# Altium PCB Serial Power Supply.PcbDoc (part 2 of 2)
Units mm, origin at the board's own origin, x right, y up, seen from the top; angles counter-clockwise.
Board outline 122 x 87 mm, 4 copper layers (Top Layer, Signal Layer 1, Signal Layer 2, Bottom Layer), stack 0.844 mm thick; 119 components, 73 nets, 366 pads, 97 vias.
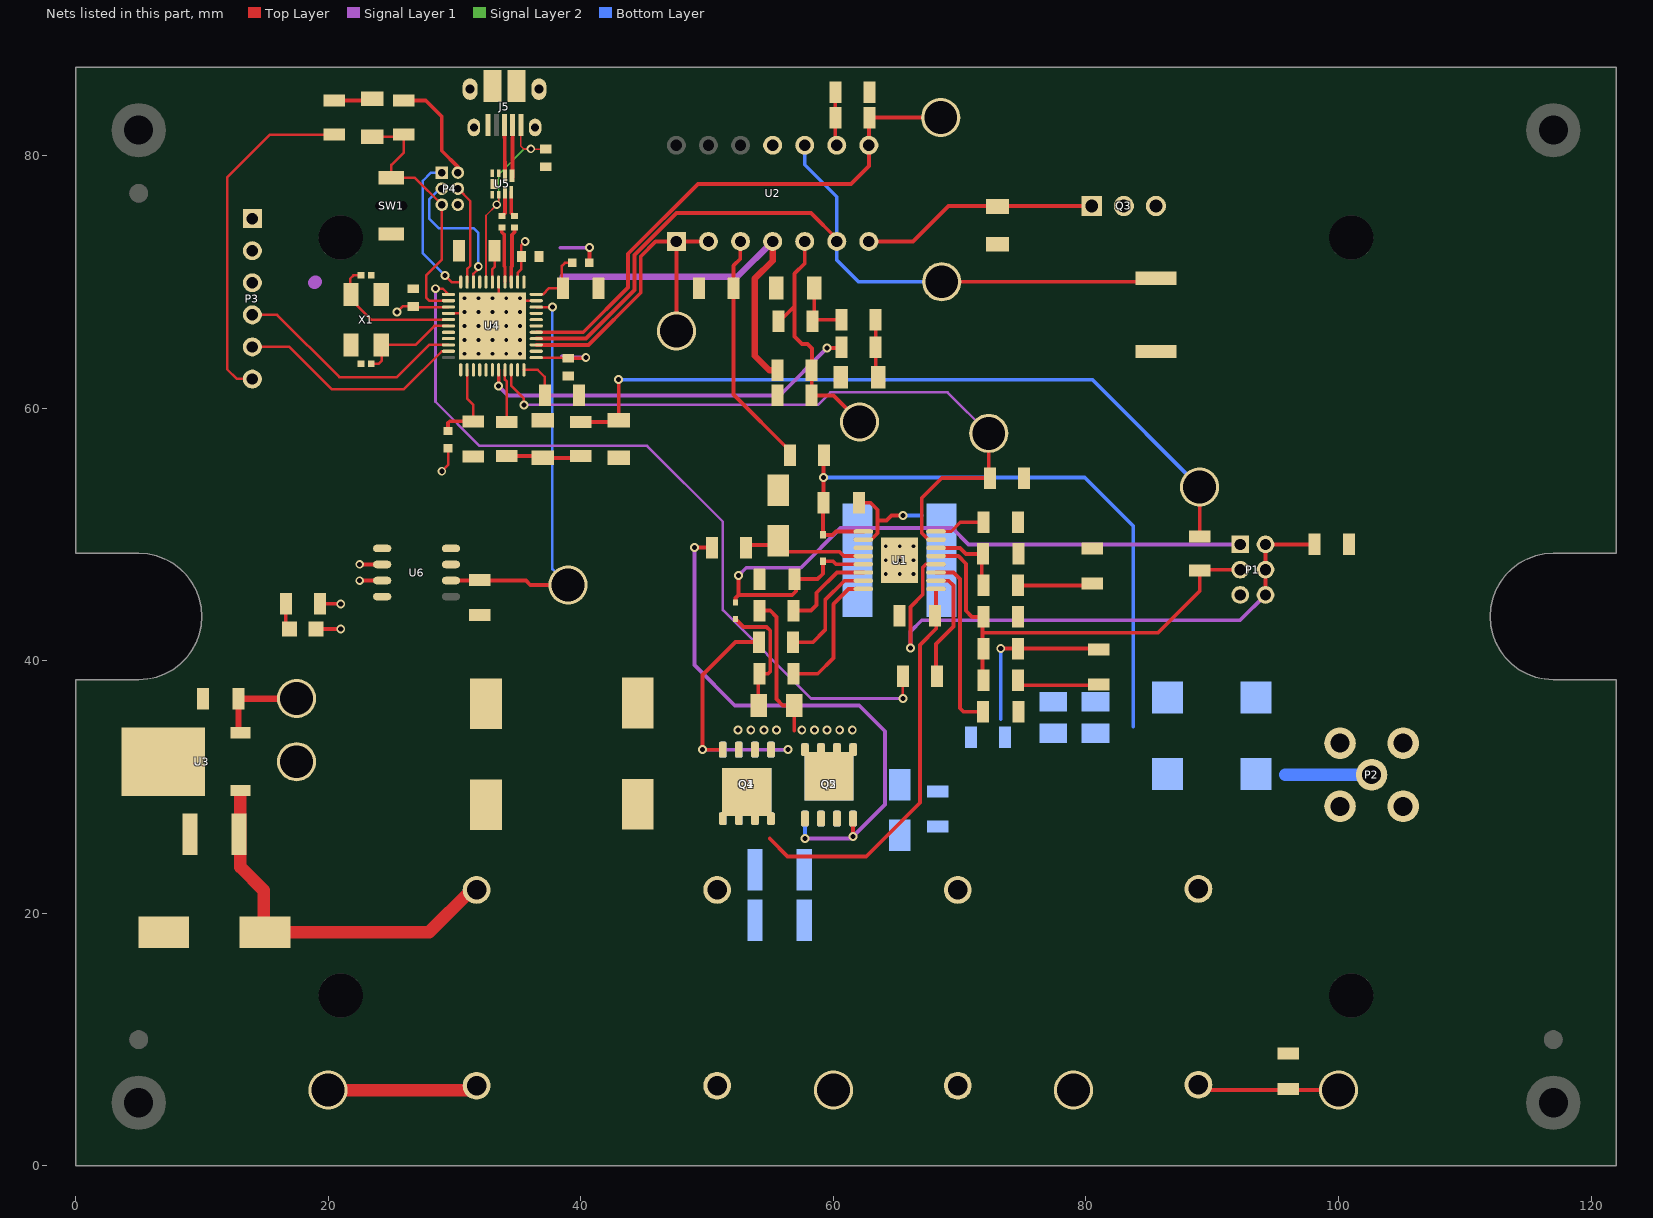
[diagram p4: the nets of this part, all layers, seen from the top]

## Part data (continued)
C16 C17: library part CMP-2100-03689-1, "Standard Tantalum, 22 uF, +/- 10%, 16 V, -55 to 125 degC, 2-Pin SMD (1210), RoHS, Tape and Reel", Capacitance=22uF, Case/Package=1210, Case Code (Metric)=3528, Dielectric Material=Tantalum, ESR (Equivalent Series Resistance)=2.3Ohm, Leakage Current=3.5uA, Manufacturer=AVX, Max Operating Temperature=125degC, Min Operating Temperature=-55degC, Package Description="2-Pin Surface Mount Device, Body 3.5 x 2.85 mm", Package Quantity=1, Package Reference=TAJ-B-2, Tolerance=10%, Voltage=16V, Case Code (Imperial)=1210, Datasheet URL=http://datasheets.avx.com/TAJ.pdf, Datasheet Version=42401.0, Depth=2.8mm, Dissipation Factor=6%, Height=1.9mm, Height - Seated (Max)=0.083inch, Lead Free=LeadFree, Length=3.5mm, Manufacturer URL=http://www.avx.com/, Number of Pins=2, Packaging=TapeandReel, Polarity=Polar, Radiation Hardening=No, REACH SVHC=NoSVHC, RoHSCompliant=True, Termination=SMD/SMT, Voltage Rating=16V, Voltage Rating (DC)=16V, Width=2.8mm
C21 C23 C24 C25 C33 C34 C36: library part CMP-1037-04202-1, "CAP 100nF 50V ±10% 1206 (3216 Metric) Thickness 1mm SMD", Case-EIA=1206, Case-Metric=3216, Rated Voltage="50 V", Tolerance=±10%, Max Thickness="1 mm", Technology=SMT
C22 C26 C35 C37: library part CMP-1035-02796-1, "CAP 10uF 6.3V ±10% 0603 (1608 Metric) Thickness 1mm SMD", Case-EIA=0603, Case-Metric=1608, Rated Voltage="6.3 V", Tolerance=±10%, Max Thickness="1 mm", Technology=SMT
C30 C31: library part CMP-1034-00701-1, "CAP 10pF 10V ±2% 0402 (1005 Metric) Thickness 0.6mm SMD", Case-EIA=0402, Case-Metric=1005, Rated Voltage="10 V", Tolerance=±2%, Max Thickness="0.6 mm", Technology=SMT
D1: library part CMP-1054-00073-1, "Switching Diode, 2-Pin SOD-523, Tape and Reel", Manufacturer="On Semiconductor", PartNumber=BAS521, Supplier Part Number 1=621-BAS521-7, ComponentLink1Description="Manufacturer URL", ComponentLink1URL=http://www.onsemi.com/, ComponentLink2Description=Datasheet, ComponentLink2URL=http://www.onsemi.com/pub_link/Collateral/BAS16XV2T1-D.PDF, ComponentLink3Description="Package Specification", ComponentLink3URL=http://www.onsemi.com/pub_link/Collateral/502-01.PDF, Configuration=Single, DatasheetVersion="Rev. 7", IF Max (A)=0.2, Mounting Technology="Surface Mount", PackageDescription="2-Pin SOD, Body 1.2 x 0.8 mm", PackageReference=SOD-523-2-502-01, PackageVersion="Rev. E, 09/2010", Packing="Tape and Reel", RoHS=FALSE, Supplier 1=Mouser, trr Max (ns)=6
D2 D8: library part CMP-1667-00003-1, "Surface Mount Schottky Barrier Rectifier, 40 V, 3 A, -55 to 150 degC, 2-Pin SMA, RoHS, Tape and Reel", Case\Package=SMA, Forward Current="3 A", Forward Voltage="500 mV", Max Operating Temperature="125 degC", Max Surge Current="80 A", Min Operating Temperature="-55 degC", Package Quantity=5000, Peak Reverse Current="500 uA", Supplier Part Number 1=621-B160-F, ComponentLink1Description="Manufacturer URL", ComponentLink1URL=http://www.diodes.com/, ComponentLink2Description=Datasheet, ComponentLink2URL=http://www.diodes.com/_files/datasheets/ds30891.pdf, DatasheetVersion="Rev. 17 - 2, 09/2015", Elements=1, Height="2.1 mm", Length="4.6 mm", Mount="Surface Mount", Mounting Technology="Surface Mount", PackageDescription="2-Pin Surface Mounted Assembly, Body 4.3 x 2.605 mm, Height 2.4 mm", PackageReference=SMA-2, Packaging="Tape and Reel", Pins=2, Radiation Hardening=No, REACH SVHC="No SVHC", RoHSCompliant=true, Supplier 1=Mouser, Width="2.92 mm"
D3: library part CMP-1667-00004-1, "Fast Switching Diode, 75 V, 0.3 A, -65 to 150 degC, 2-Pin SOD323, RoHS, Tape and Reel", ComponentLink1Description="Manufacturer URL", ComponentLink1URL=http://www.diodes.com/, ComponentLink2Description=Datasheet, ComponentLink2URL=http://www.diodes.com/datasheets/ds30097.pdf, DatasheetVersion="Rev. 25-2, 03/2016", PackageDescription="2-Pin Small Outline Diode, Body 1.7 x 1.3 mm", PackageReference=SOD323-2
DS1: library part CMP-1674-00002-5, "LED Uni-Color Green, 100 mW, 120 mA, -55 to 85 degC, 2-Pin SMD, RoHS, Tape and Reel", Colour=Green, Manufacturer=Lite-On, Max Operating Temperature="85 degC", Min Operating Temperature="-55 degC", Package Quantity=1, ComponentLink1Description="Manufacturer URL", ComponentLink1URL=http://www.us.liteon.com/, ComponentLink2Description=Datasheet, ComponentLink2URL=http://media.digikey.com/pdf/Data%20Sheets/Lite-On%20PDFs/LTST-C170GKT.pdf, DatasheetVersion=03/2003, Height="1.1 mm", Length="2 mm", Mount="Surface Mount", Mounting Technology="Surface Mount", PackageDescription="2-Pin Surface Mount Device, Body 2 x 1.25 mm", PackageReference=C170GKT, Packaging="Tape and Reel", Pins=2, RoHSCompliant=true
FB1 FB2: library part CMP-0686-00368-2, "Chip Ferrite Bead for GHz Band High-speed Signal Lines, 1500 Ohm, 500 mA, -55 to 125 degC, 1.6 x 0.8 x 0.95 mm SMD, Tape and Reel", DC Resistance="0.50 Ohm Max.", Manufacturer=Murata, Operating Temperature Range="-55 to 125 degC", Rated Current="500 mA", ComponentLink1Description="Manufacturer URL", ComponentLink1URL=http://www.murata.com/, ComponentLink2Description=Datasheet, ComponentLink2URL=http://www.murata.com/products/catalog/pdf/c31e.pdf, ComponentLink3Description="Package Specification", ComponentLink3URL=http://www.murata.com/products/catalog/pdf/c31e.pdf, DatasheetVersion=08/2013, Impedance (at 100 MHz)="1500 Ohm +/- 25%", Mounting Technology="Surface Mount", PackageDescription="2-Pin Chip, Body 1.6 x 0.8 mm", PackageReference=BLM18_H950-2, Packing="Tape and Reel", PartNumber=BLM18HE152SN1D
FD1 FD2 FD3: library part Fiducial
J1 J4: library part SYM-20399854-1, "Banana Socket, 20a, 4mm, Pcb, Red", Supplier Part Number 1=80P3616, Supplier 1=Newark
J2 J3: library part SYM-20399854-1, "Banana Socket, 20a, 4mm, Pcb, Black", Supplier Part Number 1=80P3613, Supplier 1=Newark
J5: library part CMP-1698-00007-1, "Micro USB 2.0 B Receptacle, -55 to 85 degC, 5-Pin SMD, RoHS, Tape and Reel", Case\Package=0603, Case Code (Metric)=1608, Max Operating Temperature="155 degC", Min Operating Temperature="-55 degC", Package Quantity=5000, Power Rating="100 mW", Resistance="4.7 kohm", Tolerance=1%, Type (Resistor)="Thick Film", Voltage Rating="75 V", Case Code (Imperial)=0603, ComponentLink1Description="Manufacturer URL", ComponentLink1URL=http://portal.fciconnect.com/, ComponentLink2Description=Datasheet, ComponentLink2URL=http://portal.fciconnect.com/Comergent//fci/drawing/10103594.pdf, DatasheetVersion="Rev. A, 06/2010", Height="0.45 mm", Length="1.55 mm", Mount="Surface Mount", PackageDescription="5-Pin Surface Mount Device, Body 8.04 x 5.62 mm", PackageReference=FCI-10103594-0001LF, Packaging="Tape and Reel", Pins=2, REACH SVHC=Unknown, RoHSCompliant=true, Weight="7.1E-05 oz", Width="0.85 mm"
L1: library part IND-2, Supplier Part Number 1=994-XAL1010-682MEB, Supplier 1=Mouser
MH1 MH2 MH3 MH4: "Mounting Hole, Screw"
P1: library part CMP-1029-00207-1, "Flexible Through-Hole Header, Vertical, -55 to 105 degC, 2 mm Pitch, 6-Pin, Male, RoHS", Manufacturer=Samtec, Temperature Range="-55 to 105 degC", ComponentLink1Description="Manufacturer URL", ComponentLink1URL=http://www.samtec.com, ComponentLink2Description=Datasheet, ComponentLink2URL=http://d2a072wq521u33.cloudfront.net/catalog_english//TMMH_TH.PDF, ComponentLink3Description="Package Specification", ComponentLink3URL=http://www.samtec.com/documents/webfiles/cpdf/TMMH-1XX-XX-XX-D-XXX-XXX-MKT1.pdf, DatasheetVersion=F-214, Mounting Technology=Through-hole, Orientation=Vertical, PackageDescription="2mm x 2mm Terminal Strip Assembly", PackageReference=TMMH-103-06-X-D, PackageVersion="AR, 12/1996", PartNumber=TMMH-103-06-T-D, Pitch="2 mm", RoHS=True
P2: "SMB Straight Connector", LatestRevisionDate=17-Jul-2002, LatestRevisionNote="Re-released for DXP Platform.", Publisher="Altium Limited"
P3: "Header, 6-Pin", LatestRevisionDate=17-Jul-2002, LatestRevisionNote="Re-released for DXP Platform.", Publisher="Altium Limited"
P4: "Header, 3-Pin, Dual row", LatestRevisionDate=17-Jul-2002, LatestRevisionNote="Re-released for DXP Platform.", Publisher="Altium Limited"
Q1 Q2 Q4 Q5: "N-Channel 60 V (D-S) MOSFET", Supplier Part Number 1=781-SI7370DP-GE3, ComponentLink1Description=Datasheet, ComponentLink1URL=https://www.vishay.com/docs/71874/si7370dp.pdf, Supplier 1=Mouser
Q3: library part NMOS-2, "N-Channel Power MOSFET", Supplier Part Number 1=512-MTP3055VL, ComponentLink1Description="Manufacturer Link", ComponentLink1URL=http://www.irf.com/, DatasheetVersion=PD-9.814, LatestRevisionDate=17-Jul-2002, LatestRevisionNote="Re-released for DXP Platform.", Note="Pin 2 is electrically connected to pin 4.", PackageDescription="TO, Thru-Hole, Vertical, Heatsink Mounted; 3 In-Line Leads; Pitch 2.54 mm", PackageReference=TO-220AB, PackageVersion=Feb-1997, Published=8-Jun-2000, Publisher="Altium Limited", Supplier 1=Mouser
R1 R8 R12 R13 R17 R23 R26 R29: library part CMP-1014-00623-1, "10K 0.25W 1% 1206 (3216 Metric)  SMD", Case-EIA=1206, Case-Metric=3216, Power="0.25 W", Tolerance="1 %", Technology=SMT
  R26: Populate=0
R2 R4 R5 R14 R15 R16 R24: library part CMP-1014-00001-1, "Jumper 1206 (3216 Metric)", Case-EIA=1206, Case-Metric=3216, Power=None, Technology=SMT, Tolerance=None
  R16 R24: Populate=0
R3 R9 R18: library part CMP-1014-00736-1, "100K 0.25W 1% 1206 (3216 Metric)  SMD", Case-EIA=1206, Case-Metric=3216, Power="0.25 W", Tolerance="1 %", Technology=SMT
R6: library part CMP-1014-00929-1, "5M1 0.25W 1% 1206 (3216 Metric)  SMD", Case-EIA=1206, Case-Metric=3216, Power="0.25 W", Tolerance="1 %", Technology=SMT
R7: library part CMP-1014-00677-1, "30K9 0.25W 1% 1206 (3216 Metric)  SMD", Case-EIA=1206, Case-Metric=3216, Power="0.25 W", Tolerance="1 %", Technology=SMT
R10: library part CMP-1014-00743-1, "118K 0.25W 1% 1206 (3216 Metric)  SMD", Case-EIA=1206, Case-Metric=3216, Power="0.25 W", Tolerance="1 %", Technology=SMT
R11: library part CMP-1591-00005-1, "1206 (3216 Metric) Chip Resistor", Case-EIA=1206, Case-Metric=3216, Supplier Part Number 1=71-WSLP12066L000FEA, PackageReference=RESC1206(3216), Supplier 1=Mouser
R19 R20 R31 R32: library part CMP-1014-00590-1, "5K1 0.25W 1% 1206 (3216 Metric)  SMD", Case-EIA=1206, Case-Metric=3216, Power="0.25 W", Tolerance="1 %", Technology=SMT
R21 R22: library part CMP-1011-00320-1, "22R 0.063W 1% 0402 (1005 Metric)  SMD", Case-EIA=0402, Case-Metric=1005, Power="0.063 W", Tolerance="1 %", Technology=SMT
R25: library part CMP-1014-00788-1, "300K 0.25W 1% 1206 (3216 Metric)  SMD", Case-EIA=1206, Case-Metric=3216, Power="0.25 W", Tolerance="1 %", Technology=SMT
R27: library part CMP-1018-00510-1, Case-EIA=2512, Case-Metric=6432, Power="1 W", Supplier Part Number 1=71-CSM25120R0100BST, Tolerance="1 %", Supplier 1=Mouser, Technology=SMT
R28: library part CMP-1014-00731-1, "90K9 0.25W 1% 1206 (3216 Metric)  SMD", Case-EIA=1206, Case-Metric=3216, Power="0.25 W", Tolerance="1 %", Technology=SMT
R30: library part CMP-1014-00754-1, "150K 0.25W 1% 1206 (3216 Metric)  SMD", Case-EIA=1206, Case-Metric=3216, Power="0.25 W", Tolerance="1 %", Technology=SMT
SW1: library part CMP-0587-00001-2, "Switch, SPST Push Button, 50 mA, 12 V DC, SMD, -30 to 85 degC, RoHS", Contact Resistance="100 mW max", Dielectric Strength="250 V AC for 1 min", Insulation Resistance="100 MW min. 100 V DC", Manufacturer=Jianfu, Operating Temperature="-30 to 85 degC", PartNumber=TVAF06, Rating="50 mA. 12 V DC", ComponentLink1Description="Manufacturer URL", ComponentLink1URL=http://www.jian-fu.com/, ComponentLink2Description=Datasheet, ComponentLink2URL=http://en.jian-fu.com/product-22.html, Lifetime="100000 Cycles min", Mounting Technology="Surface Mount", PackageDescription="2-Pin Switch, Push Button, SMD, Body 2.9 x 3.9 mm", PackageReference=TVAF06, RoHS=TRUE, Travel="0.13 +/- 0.05 mm"
TP1 TP2 TP3 TP4 TP5 TP6 TP7 TP8 TP9 TP11 TP13 TP14: library part CMP-1672-00001-4, "Terminal DBL Turret, Through Hole, RoHS", Package Quantity=1, Supplier Part Number 1=575-2501200800000, Contact Finish=Tin, Contact Material=Brass, DatasheetVersion="Rev. A, 02/2008", Lead Pitch="0.218 inch", Length="2.77 mm", Mount="Through Hole", Mounting Technology="Through Hole", PackageDescription="1-Pin Through Hole Device, Dia 3.18 mm", PackageReference=1502-2, Pins=50, REACH SVHC="No SVHC", RoHSCompliant=true, Supplier 1=Mouser
TP10: library part CMP-1672-00001-4, Package Quantity=1, Supplier Part Number 1=575-2501200800000, Contact Finish=Tin, Contact Material=Brass, DatasheetVersion="Rev. A, 02/2008", Lead Pitch="0.218 inch", Length="2.77 mm", Mount="Through Hole", Mounting Technology="Through Hole", PackageDescription="1-Pin Through Hole Device, Dia 3.18 mm", PackageReference=1502-2, Pins=50, REACH SVHC="No SVHC", RoHSCompliant=true, Supplier 1=Mouser
U1: library part CMP-0491-00624-1, "High Voltage Synchronous Current Mode Step-Down Controller with Adjustable Operating Frequency, 16-pin SOP (FE-16-EPV-BC), -55 to 125 degC", Frequency Adjust Range="100kHz - 500kHz", Manufacturer="Linear Technology", ComponentLink1Description="Manufacturer URL", ComponentLink1URL=http://www.linear.com/, ComponentLink2Description=Datasheet, ComponentLink2URL=http://cds.linear.com/docs/en/datasheet/3845fd.pdf, ComponentLink3Description="Package Specification", ComponentLink3URL=http://cds.linear.com/docs/en/packaging/05081663__J_FE16(BC).pdf, DatasheetVersion="Rev. D", Mounting Technology="Surface Mount", Number of Outputs=1, PackageDescription="16-Pin Plastic TSSOP, Body 5 x 4.4 mm, Pitch 0.65 mm", PackageReference=FE-16, PackageVersion="Rev. J, 11/2012", PartNumber=LT3845MPFE, RoHS=FALSE
U2: library part CMP-0055-00082-1, "Low Power Quad Operational Amplifier, 14-pin MDIP", Manufacturer="National Semiconductor", PackageTopMarking=NSUZXYYTTE#*LM324N, PowerWise=N, Code_JEDEC=MS-001-AA, CompType=Amplifiers, DatasheetVersion=Aug-2000, PackageDescription="MDIP, .750 x .250 x.130in, 14 Lead, .100in Pitch", PackageReference=N14A, PackageVersion="revG, May-2006", PinCount=14, RoHS=N
U3: library part CMP-0062-00202-1, "3-Terminal Positive Voltage Regulators, 3-pin TO-252", Manufacturer="National Semiconductor", PackageTopMarking=NSUZXYTT*LM78M05*CDT, PowerWise=N, Code_JEDEC=TO-252-AA, CompType="LDO IC", DatasheetVersion=Aug-2005, PackageDescription="TO252, Molded, Jedec, 6.8 x 6.10 x 2.30mm Body, 3 Lead, 2.28mm Pitch, Surface Mount", PackageReference=TD03B, PackageVersion="revD, Feb-2009", PinCount=3, RoHS=N
U4: library part CMP-0095-00166-2, "8-bit AVR Microcontroller, 2.7-5.5V, 16MHz, 32KB Flash, 1KB EEPROM, 2.5KB SRAM, USB Controller, 44-pin QFN, Industrial Grade (-40°C to 85°C), Ext Osc", Code_JEDEC=MO-220-VKKD-1, ComponentLink1Description="Manufacturer URL", ComponentLink1URL=http://www.atmel.com/, ComponentLink2Description="ATmega16U4/32U4 Datasheet", ComponentLink2URL=http://www.atmel.com/dyn/resources/prod_documents/doc7766.pdf, ComponentLink3Description="ATmega16U4 ATmega32U4 Summary", ComponentLink3URL=http://www.atmel.com/dyn/resources/prod_documents/7766S.pdf, DatasheetVersion="revF, Nov-2010", PackageDescription="44-Pin Quad Flat No-Lead Package, 7 x 7 mm Body, 0.5 mm Pitch (QFN)", PackageReference=44PW, PackageVersion="revG, Sep-2009", RevisionNote="DatasheetVersion, PackageVersion & PCB updated. URLs added."
U5: library part CMP-1066-00065-1, "Single Pair Common Mode Filter with ESD Protection, -40 to 85 degC, 8-Pin WDFN, Pb-Free, Tape and Reel", Manufacturer="On Semiconductor", ComponentLink1Description="Manufacturer URL", ComponentLink1URL=http://www.onsemi.com/, ComponentLink2Description=Datasheet, ComponentLink2URL=http://www.onsemi.com/pub_link/Collateral/EMI2121MT-D.PDF, ComponentLink3Description="Package Specification", ComponentLink3URL=http://www.onsemi.com/pub_link/Collateral/511BN.PDF, C Typ (pF)=0.8, DatasheetVersion="Rev. 2", Mounting Technology="Surface Mount", Number of Lines=3, PackageDescription="8-Pin Small Outline No-Lead, Body 2.2 x 2 mm, Pitch 0.5 mm", PackageReference=WDFN-8-511BN, PackageVersion="Rev. A, 12/2012", Packing="Tape and Reel", PartNumber=EMI2121MTTAG, RoHS=Pb-Free, VRWM Max (V)=5
U6: library part CMP-0074-00330-3, "Precision Micropower Low Dropout Voltage Reference, 8-pin Narrow SOIC", Manufacturer="Texas Instruments", PackageTopMarking=NSZXTT*4140A*CM2.0, PowerWise=Y, Supplier Part Number 1=926-LM4140ACM10NOPB, Code_IPC=SOIC127P600-8, Code_JEDEC=MS-012-AA, ComponentLink1Description=Datasheet, ComponentLink1URL=http://www.ti.com/general/docs/lit/getliterature.tsp?genericPartNumber=LM4140&fileType=pdf, CompType="Voltage Reference IC", DatasheetVersion=Feb-2005, PackageDescription="SOIC Narrow, 4.9 x 3.9 x 1.45mm, 8 Lead, 1.27mm Pitch", PackageReference=D0008A, PackageVersion="revM, May-2009", PinCount=8, RevisionNote="Component URLs added", RoHS=N, Supplier 1=Mouser
X1: library part CMP-1688-00003-1, "Ceramic SMD Crystal, 16 MHz, +/- 20 ppm, 50 Ohm, -20 to 70 degC, 4-Pin SMD, RoHS, Tape and Reel", Case/Package=5028, Current Rating="1.82 A", Max Operating Temperature=105degC, Min Operating Temperature=-40degC, Package Quantity=500, Resistance="0.033 Ohm", Tolerance=30%, ComponentLink1Description="Manufacturer URL", ComponentLink1URL=http://www.abracon.com/, ComponentLink2Description=Datasheet, ComponentLink2URL=http://www.abracon.com/Resonators/abm3b.pdf, DatasheetVersion=Aug-15, Height="2.8 mm", Length="0.197 inch", Mount="Surface Mount", PackageDescription="4-Pin Surface Mount Device, Body 5 x 3.2 mm", PackageReference=ABM3B, Packaging="Tape and Reel", REACH SVHC=Unknown, RoHSCompliant=True, Shielding=Shielded, Width="0.197 inch"

## Free pads (board coordinates)
  round 3.5 hole 3.5: MH(21,13.5) MH(21,73.5) MH(101,13.5) MH(101,73.5)

## Via types
v1: diameter 0.7, hole 0.305, Top Layer to Bottom Layer, 34 vias
v2: diameter 0.7, hole 0.4, Top Layer to Bottom Layer, 30 vias
v3: diameter 0.8, hole 0.5, Top Layer to Bottom Layer, 24 vias
v4: diameter 0.7, hole 0.4, Top Layer to Bottom Layer, tented both sides, 9 vias

## Nets (pads, with @x,y where several pads share a name; then routed paths per layer and width w, separated by ;. In a path a pad name is that pad's centre, name@x,y a point inside that pad or via, vN(x,y) a via of type N, cw(c..) or ccw(c..) an arc to the next point about the centre after c; other vN are vias at no path point)
8: U4.28
9: C34.1 R25.1 R31.1 | length 4.9
  Top Layer w0.3: C34.1@58.481,69.5 58.481,67.161 58.32,67 R31.1@60.65,67
10: C36.1 R1.1 R32.1 TP2.1 | length 59.6
  Top Layer w0.3: R32.1@40,58.9 42.85,58.9 C36.1@43,59.05 v2(43,62.25) ; R1.1@89,49.95 TP2.1@89,53.75
  Bottom Layer w0.3: v2(43,62.25) 80.5,62.25 TP2.1@89,53.75
11: R3.1 U4.12 | length 62.7
  Top Layer w0.2: v2(28.5,69.45) 29.075,69.45 U4.12@29.525,69 ; v2(65.5,37.006) R3.1@65.5,38.75
  Signal Layer 1 w0.2: v2(28.5,69.45) 28.5,60.5 32,57 45.25,57 51.25,51 51.25,44 58.244,37.006 v2(65.5,37.006)
12: U4.26
13: U4.32
+5: C21.1 C22.2 C35.2 C37.2 FB1.1 FB2.1 P3.3 P4.2 R13.1 R23.2 R24.2 TP7.1 U2.4 U3.3 U4.2 U4.14 U4.34 U6.2 U6.3 | length 70
  Top Layer w0.2: v2(25.45,67.6) 25.9,68.05 C35.2@26.75,68.05 26.8,68 U4.14@29.525,68 ; v2(29,55) 29.5,55.5 FB1.1@29.5,56.825 ; U4.2@35,69.975 35,70.7 35.3,71 C37.2@35.3,72 35.3,72.9 v2(35.6,73.2) ; U4.34@36.475,64 38.725,64 C22.2@38.887,63.838
  Top Layer w0.3: U3.3@12.9,34.43 U3.3@13.05,34.28 ; TP7.1@17.469,36.975 TP7.1@17.5,37.006 ; R13.1@19.35,44.5 v2(21,44.5) ; v2(22.5,46.331) 22.515,46.346 U6.3@24.275,46.346 ; v2(22.5,47.631) 22.515,47.616 U6.2@24.275,47.616 ; R23.2@26,84.35 27.727,84.35 29,83.077 29,80.367 30.27,79.097 P4.2@30.27,78.64 ; C22.2@39,63.95 40.35,63.95 v2(40.4,64) ; FB2.1@40.675,71.5 40.7,71.525 v2(40.7,72.7)
  Top Layer w0.5: U3.3@12.9,34.43 C21.1@12.9,36.975 TP7.1@17.469,36.975 ; U2.4@55.191,73.19 55.191,71.666 53.785,70.26 53.785,64.153 54.938,63 R24.2@55.581,63
  Signal Layer 1 w0.3: 38.4,72.7 v2(40.7,72.7) ; 38.525,64.1 38.625,64 v2(40.4,64)
  Signal Layer 1 w0.5: 38.55,70.4 52.401,70.4 U2.4@55.191,73.19
  Signal Layer 1 w1: 18.92,69.92 19,70
+20: C1.2 C8.1 C9.1 C10.2 C11.2 C19.1 C20.2 J1.1 Q1.D Q4.D TP6.1 U1.1 U3.1 | length 73.6
  Top Layer w0.3: 54.96,25.911 56.371,24.5 62.598,24.5 66.85,28.752 66.85,41.25 68.15,42.55 68.15,43.556 68.125,43.581 U1.1@68.125,45.681
  Top Layer w1: U3.1@13.05,29.5 13.05,23.65 14.9,21.8 14.9,18.5 C19.1@15,18.5 28,18.5 31.35,21.85 J1.1@31.75,21.85 ; TP6.1@20,6 31.4,6 J1.1@31.75,6.35
A0: TP4.1 U2.1 U2.2 U4.36 | length 25.8
  Top Layer w0.3: U4.36@36.475,65 40.614,65 44.75,69.136 44.75,72.01 45.93,73.19 U2.1@47.571,73.19 ; TP4.1@47.571,66.093 U2.1@47.571,73.19 ; U2.2@50.111,73.19 U2.1@47.571,73.19
A1: Q3.3 R27.2 TP13.1 U2.6 U2.10 U4.37 | length 67.2
  Top Layer w0.3: U4.37@36.475,65.5 40.407,65.5 44.25,69.343 44.25,72.114 47.586,75.45 58.231,75.45 60.271,73.41 U2.6@60.271,73.19 ; TP13.1@68.575,70 85.26,70 R27.2@85.54,70.28 R27.2@85.69,70.43 ; Q3.3@85.4,75.86 Q3.3@85.54,76
  Bottom Layer w0.3: U2.10@57.731,80.81 57.731,79.269 60.271,76.729 U2.6@60.271,73.19 60.271,71.729 62,70 TP13.1@68.575,70
A2: R28.2 TP14.1 U2.8 U4.38 | length 42.9
  Top Layer w0.3: U4.38@36.475,66 40.2,66 43.75,69.55 43.75,72.218 49.282,77.75 61.4,77.75 62.811,79.161 U2.8@62.811,80.81 62.811,82.961 R28.2@62.85,83 TP14.1@68.5,83
A3: U4.39
A4: U4.40
A5: U4.41
D2: U4.19
D3: U4.18
D4: U4.25
D5: R18.2 TP3.1 U1.7 U4.31 | length 55.4
  Top Layer w0.2: U4.31@34.5,63.025 34.5,61.75 35.5,60.75 v2(35.5,60.25)
  Top Layer w0.3: U1.7@68.125,49.581 67.536,49.581 67,50.117 67,52.881 68.575,54.456 72.3,54.456 TP3.1@72.3,58
  Signal Layer 1 w0.2: v2(35.5,60.25) 58.771,60.25 59.771,61.25 69.05,61.25 TP3.1@72.3,58
D6: U4.27
D7: U4.1
GND: C1.1 C3.1 C4.1 C5.1 C6.1 C7.1 C8.2 C9.2 C10.1 C11.1 C14.2 C15.2 C16.2 C17.2 C18.1 C19.2 C20.1 C21.2 C22.1 C24.2 C25.2 C26.1 C27.1 C28.1 C29.1 C30.1 C31.1 C32.1 C33.2 C34.2 C35.1 C36.2 C37.1 D2.1 D8.1 DS1.1 J2.1 J5.5 J5.6 J5.7 J5.8 J5.9 J5.10 J5.11 P1.5 P3.1 P3.2 P4.6 Q2.S Q5.S R6.1 R8.1 R10.1 R12.2 R17.2 R18.1 R26.1 R27.1 R29.1 SW1.1 TP5.1 TP8.1 U1.11 U1.17 U2.11 U3.4 U4.5 U4.15 U4.23 U4.35 U4.43 U4.45 U5.3 U5.4 U5.5 U5.9 U6.1 U6.4 U6.7 U6.8 X1.2 X1.4 | length 13.1
  Top Layer w0.2: U4.15@29.525,67.5 32,67.5 v1(33,66.5) U4.45@33.5,67 ; U4.5@33.5,69.975 U4.45@33.5,67 ; U4.43@36.475,68.5 35,68.5 v1(34.1,67.6) U4.45@33.5,67
  Top Layer w0.3: DS1.1@19.05,42.5 v2(21,42.5)
  other v1: 64.15,46.856 65.25,46.856 66.35,46.856 64.15,47.956 65.25,47.956 66.35,47.956 64.15,49.056 65.25,49.056 66.35,49.056 30.8,64.3 31.9,64.3 33,64.3 34.1,64.3 35.2,64.3 30.8,65.4 31.9,65.4 33,65.4 34.1,65.4 35.2,65.4 30.8,66.5 31.9,66.5 34.1,66.5 35.2,66.5 30.8,67.6 31.9,67.6 33,67.6 35.2,67.6 30.8,68.7 31.9,68.7 33,68.7 34.1,68.7 35.2,68.7
NetC2_1: C2.1 D1.1 R2.2 | length 9.9
  Top Layer w0.3: D1.1@52.25,43.296 52.878,42.668 54.709,42.668 55,42.378 55,39.146 54.822,38.968 54.05,38.968 54.05,36.504 C2.1@54.097,36.456
NetC2_2: C2.2 C4.2 D2.2 L1.1 Q1.S Q2.D Q4.S Q5.D R5.2 | length 11.8
  Top Layer w0.3: R5.2@54.05,43.968 55,43.968 55.5,43.468 55.5,36.954 55.997,36.456 C2.2@56.897,36.456 56.897,34.456
  other v4: 52.461,34.5 53.461,34.5 54.5,34.5 55.5,34.5 57.5,34.5 58.5,34.5 59.5,34.5 60.5,34.5 61.5,34.5
NetC3_2: C3.2 U1.3 | length 14.2
  Top Layer w0.3: U1.3@68.125,46.981 69.5,46.981 70.025,46.456 70.025,36.231 70.3,35.956 C3.2@71.75,35.956
NetC5_2: C5.2 D1.2 D3.2 P1.1 U1.13 | length 56.3
  Top Layer w0.3: D1.2@52.25,44.616 52.25,44.956 52.5,45.206 ; v2(52.5,46.756) 52.5,45.206 ; U1.13@62.375,47.631 60.206,47.631 59.961,47.876 D3.2@59.172,47.876 59.172,46.879 58.75,46.456 57.039,46.456 57.039,45.495 56.75,45.206 52.5,45.206
  Signal Layer 1 w0.3: v2(52.5,46.756) 53.1,47.356 57.425,47.356 60.569,50.5 69.406,50.5 70.7,49.206 P1.1@92.212,49.206
NetC6_2: C6.2 R7.2 U1.6 | length 6.3
  Top Layer w0.3: U1.6@68.125,48.931 70.025,48.931 70.5,48.456 71.75,48.456 71.75,46.006 R7.2@71.8,45.956
NetC7_2: C7.2 R7.1 | length 5.9
  Top Layer w0.3: R7.1@74.6,45.956 C7.2@80.5,45.956
NetC12_1: C12.1 R14.2 | length 6.6
  Top Layer w0.3: R14.2@74.6,38.456 75,38.056 C12.1@81,38.056
NetC23_1: C23.1 R16.2 | length 3.1
  Top Layer w0.3: R16.2@20.5,84.35 23.35,84.35 C23.1@23.5,84.5
NetC24_1: C24.1 R19.1 R31.2 | length 4.6
  Top Layer w0.3: R31.2@63.35,67 R19.1@63.35,64.8 63.35,62.671 C24.1@63.571,62.45
NetC25_1: C25.1 R20.1 R32.2 | length 6
  Top Layer w0.3: R20.1@34.15,56.2 36.85,56.2 C25.1@37,56.05 39.85,56.05 R32.2@40,56.2
NetC27_2: C27.2 TP9.1 U4.42 U6.6 | length 33.2
  Top Layer w0.2: U4.42@36.475,68 v2(37.75,68)
  Top Layer w0.3: U6.6@29.725,46.346 35.654,46.346 36,46 TP9.1@39,46
  Bottom Layer w0.2: v2(37.75,68) 37.75,47.25 TP9.1@39,46
NetC28_2: C28.2 FB2.2 U4.44 | length 5.1
  Top Layer w0.2: U4.44@36.475,69 37,69 37.5,69.5 C28.2@38.6,69.5 38.5,69.6 38.5,71.25 38.75,71.5 FB2.2@39.325,71.5
NetC29_2: C29.2 FB1.2 U4.24 | length 7
  Top Layer w0.2: U4.24@31,63.025 31,60.75 31.5,60.25 C29.2@31.5,58.95
  Top Layer w0.3: FB1.2@29.5,58.175 29.5,58.825 29.625,58.95 C29.2@31.5,58.95
NetC30_2: C30.2 U4.16 X1.1 | length 11
  Top Layer w0.2: C30.2@22.6,70.5 22,70.5 21.75,70.25 21.75,69.05 X1.1@21.8,69 21.8,68.58 23.38,67 U4.16@29.525,67
NetC31_2: C31.2 U4.17 X1.3 | length 8.2
  Top Layer w0.2: C31.2@23.4,63.5 24,63.5 24.25,63.75 24.25,64.95 X1.3@24.2,65 26.907,65 28.407,66.5 U4.17@29.525,66.5
NetC32_2: C32.2 U4.6 | length 2.6
  Top Layer w0.2: U4.6@33,69.975 33,71 33.172,71.172 C32.2@33.172,72.46
NetC33_1: C33.1 Q3.1 U2.7 | length 18.8
  Top Layer w0.3: U2.7@62.811,73.19 66.315,73.19 69.125,76 Q3.1@80.46,76
NetD8_2: D8.2 R15.1 U1.12 | length 9.5
  Top Layer w0.3: R15.1@53.2,49.156 55.75,49.156 56.275,48.631 60.475,48.631 60.825,48.281 U1.12@62.375,48.281
NetDS1_2: DS1.2 R13.2 | length 2.1
  Top Layer w0.3: R13.2@16.65,44.5 16.65,42.8 DS1.2@16.95,42.5
NetP1_2: P1.2 P1.4 P1.6 R6.2 U1.4 | length 46.4
  Top Layer w0.3: v2(66.1,41) 66.1,44.256 67.073,45.229 67.073,47.373 67.331,47.631 U1.4@68.125,47.631 ; P1.6@94.212,44.956 P1.6@94.212,45.206 P1.4@94.212,47.206 P1.2@94.212,48.956 ; P1.2@94.212,49.206 R6.2@98.012,49.206
  Signal Layer 1 w0.3: v2(66.1,41) 66.1,42.3 67,43.2 92.206,43.2 P1.6@94.212,45.206
NetP3_4: P3.4 U4.20 | length 18.6
  Top Layer w0.2: P3.4@14,67.38 15.96,67.38 20.89,62.45 25.45,62.45 28,65 U4.20@29.525,65
NetP3_5: P3.5 U4.21 | length 18.2
  Top Layer w0.2: P3.5@14,64.84 16.935,64.84 20.275,61.5 26,61.5 29,64.5 U4.21@29.525,64.5
NetP3_6: P3.6 R16.1 | length 27.4
  Top Layer w0.2: P3.6@14,62.3 13.975,62.325 12.75,62.325 12,63.075 12,78.25 15.4,81.65 R16.1@20.5,81.65
NetQ1_G: Q1.G Q4.G R4.2 | length 21.1
  Top Layer w0.3: Q4.G@51.25,32.956 v2(49.65,32.956) 49.65,38.856 52.262,41.468 R4.2@54.01,41.468
  Signal Layer 1 w0.3: v2(49.65,32.956) v2(56.4,32.956)
  Bottom Layer w0.3: Q1.G@55.039,32.978 Q1.G@55.06,32.956 v2(56.4,32.956)
NetQ2_G: Q2.G Q5.G R15.2 | length 44.2
  Top Layer w0.3: v2(49,48.956) R15.2@50.4,48.956 ; v2(61.546,26.086) 61.56,26.1 Q5.G@61.56,27.491
  Signal Layer 1 w0.3: v2(49,48.956) 49,39.651 52.195,36.456 62.044,36.456 64.083,34.417 64.083,28.623 v2(61.546,26.086) 61.371,25.911 v2(57.75,25.911)
  Bottom Layer w0.3: v2(57.75,25.911) Q2.G@57.75,27.491
NetR2_1: R2.1 U1.16 | length 10.7
  Top Layer w0.3: R2.1@56.95,38.968 58.762,38.968 60,40.206 60,44.476 61.205,45.681 U1.16@62.375,45.681
NetR3_2: R3.2 U1.2 | length 9.3
  Top Layer w0.3: R3.2@68.125,38.75 68.125,41.331 69.5,42.706 69.5,45.956 69.125,46.331 U1.2@68.125,46.331
NetR4_1: R4.1 U1.15 | length 8.9
  Top Layer w0.3: R4.1@56.91,41.468 56.922,41.456 58.385,41.456 59.349,42.42 59.349,44.805 60.875,46.331 U1.15@62.375,46.331
NetR5_1: R5.1 U1.14 | length 7.2
  Top Layer w0.3: R5.1@56.95,43.968 58.229,43.968 58.672,44.412 58.672,45.374 60.28,46.981 U1.14@62.375,46.981
NetR10_2: R10.2 U1.8 | length 4
  Top Layer w0.254: U1.8@68.125,50.231 69.325,50.231 70.05,50.956 R10.2@71.8,50.956
NetR12_1: R12.1 R30.1 U2.3 | length 19
  Top Layer w0.3: U2.3@52.625,73.225 52.625,71.8 52.1,71.275 52.1,61.075 56.55,56.625 R30.1@56.55,56.25
NetR17_1: R17.1 U4.33 | length 3.4
  Top Layer w0.2: U4.33@35.5,63.025 36.595,63.025 37.15,62.47 R17.1@37.15,61
NetR19_2: R19.2 U4.29 | length 30.3
  Top Layer w0.3: v2(33.5,61.75) U4.29@33.5,63.025 ; v2(59.5,64.75) 60.6,64.75 R19.2@60.65,64.8
  Signal Layer 1 w0.3: v2(33.5,61.75) 34.25,61 55.75,61 v2(59.5,64.75)
NetR20_2: R20.2 U4.30 | length 4.2
  Top Layer w0.2: U4.30@34,63.025 34,62.25 34.15,62.1 R20.2@34.15,58.9
NetR24_1: R24.1 R25.2 R26.2 TP11.1 U2.5 | length 19.8
  Top Layer w0.3: R25.2@55.665,66.875 55.742,66.875 56.931,68.064 ; U2.5@57.731,73.19 57.731,71.442 56.931,70.642 56.931,68.064 ; TP11.1@62.071,58.9 62.071,58.929 60,61 R26.2@58.281,61 R24.1@58.281,63 58.3,63.019 58.3,64.718 57.945,65.072 57.525,65.072 56.931,65.666 56.931,68.064
NetR28_1: R28.1 R29.2 U2.9 | length 4.2
  Top Layer w0.3: R29.2@60.15,85 R28.1@60.15,83 60.15,80.931 U2.9@60.271,80.81
PB0: U4.8
PB1: P4.3 U4.9 | length 11.3
  Top Layer w0.2: U4.9@31.5,69.975 31.5,70.636 31.888,71.024 v2(31.888,71.2)
  Bottom Layer w0.2: P4.3@29,77.37 28.87,77.37 28,76.5 28,75 28.75,74.25 31.5,74.25 31.888,73.862 v2(31.888,71.2)
PB2: P4.4 U4.10 | length 7.9
  Top Layer w0.2: P4.4@30.27,77.37 31.25,76.39 31.25,71.25 31,71 U4.10@31,69.975
PB3: P4.1 U4.11 | length 11.5
  Top Layer w0.2: v2(29.25,70.5) 29.775,69.975 U4.11@30.5,69.975
  Bottom Layer w0.2: P4.1@29,78.64 28.14,78.64 27.5,78 27.5,72.25 v2(29.25,70.5)
RESET: C23.2 P4.5 R23.1 SW1.2 U4.13 | length 21
  Top Layer w0.2: C23.2@23.5,81.5 25.85,81.5 R23.1@26,81.65 26,80.25 25,79.25 SW1.2@25,78.225 26.875,78.225 P4.5@29,76.1 29,71.75 27.75,70.5 27.75,68.75 28,68.5 U4.13@29.525,68.5
Return: J3.1 P2.2 Q3.2 TP10.1
Sense+: C13.2 L1.2 R11.1 U1.10 | length 8.6
  Top Layer w0.3: C13.2@62.019,52.506 62.95,52.506 63.5,51.956 63.5,51.1 ; U1.10@62.375,49.581 62.997,49.581 63.5,50.085 63.5,51.1 ; v2(65.5,51.5) 64.6,51.5 64.2,51.1 63.5,51.1
  Bottom Layer w0.3: v2(65.5,51.5) 66.999,51.5
Sense-: C12.2 C13.1 C14.1 C15.1 C16.1 C17.1 C18.2 D3.1 J4.1 P2.1 R9.2 R11.2 R30.2 TP1.1 U1.9 | length 83.1
  Top Layer w0.3: R30.2@59.25,56.25 59.219,56.219 v2(59.219,54.5) 59.219,52.553 59.172,52.506 D3.1@59.172,49.986 59.203,49.956 59.922,49.956 60.198,50.231 U1.9@62.375,50.231 ; v2(73.25,40.956) 76.75,40.956 80.944,40.956 C12.2@81,40.9 ; J4.1@88.9,6.429 89.329,6 TP1.1@100,6
  Bottom Layer w0.3: v2(59.219,54.5) 60.28,54.5 79.9,54.5 83.75,50.65 83.75,34.8 ; 73.25,35.373 v2(73.25,40.956)
  Bottom Layer w1: 95.779,30.971 P2.1@102.612,30.971
USB_1_N: R21.1 U5.8 | length 2
  Top Layer w0.3: U5.8@34.5,77.1 34.5,75.45 R21.1@34.75,75.2
USB_1_P: R22.1 U5.7 | length 2
  Top Layer w0.3: R22.1@33.75,75.2 34,75.45 U5.7@34,77.1
USB_2_N: R21.2 U4.3 | length 4.4
  Top Layer w0.25: U4.3@34.5,69.975 34.5,71.2 34.55,71.25
  Top Layer w0.3: 34.55,71.25 34.55,73.725 34.75,73.925 R21.2@34.75,74.3
USB_2_P: R22.2 U4.4 | length 4.4
  Top Layer w0.25: 33.95,71.25 34,71.2 U4.4@34,69.975
  Top Layer w0.3: R22.2@33.75,74.3 33.75,73.925 33.95,73.725 33.95,71.25
USB_N: J5.2 U5.1 | length 4.2
  Top Layer w0.3: U5.1@34.588,78.25 34.588,81.375 34.613,81.4 J5.2@34.613,82.425
USB_P: J5.3 U5.2 | length 4
  Top Layer w0.3: J5.3@33.963,82.425 33.963,81.4 33.988,81.375 33.988,79.5 34,79.488 U5.2@34,78.4
Vbus: C26.2 J5.1 U4.7 U5.6 | length 18
  Top Layer w0.127: U4.7@32.5,69.975 32.5,75.25 v2(33.35,76.1) 33.5,76.25 U5.6@33.5,76.9 ; J5.1@35.262,82.425 35.262,80.737 35.475,80.525 v2(36.044,80.525) 35.525,80.525 35.5,80.5 C26.2@37.22,80.5
  Signal Layer 2 w0.127: v2(33.35,76.1) 33.35,76.2 33.5,76.35 33.5,78.5 35.525,80.525 v2(36.044,80.525)
VFB: P1.3 R1.2 R8.2 R9.1 R14.1 U1.5 | length 36.2
  Top Layer w0.3: U1.5@68.125,48.281 69.895,48.281 70.5,47.676 70.5,43.956 70.988,43.468 71.8,43.468 71.8,42.212 ; R14.1@71.8,38.456 71.8,40.956 71.8,42.212 ; R1.2@89,47.05 89,45.5 85.712,42.212 71.8,42.212 ; R1.2@89,47.206 P1.3@92.212,47.206
pads on no net: FD1.1 FD1.2 FD2.1 FD2.2 FD3.1 FD3.2 J5.4 MH1.MH MH2.MH MH3.MH MH4.MH SW1.MH1 SW1.MH2 U2.12 U2.13 U2.14 U4.22 U6.5
copper on no net:
  other v3: 4.175,3.571 5.825,3.571 116.175,3.571 117.825,3.571 3.35,5 6.65,5 115.35,5 118.65,5 4.175,6.429 5.825,6.429 116.175,6.429 117.825,6.429 4.175,80.571 5.825,80.571 116.175,80.571 117.825,80.571 3.35,82 6.65,82 115.35,82 118.65,82 4.175,83.429 5.825,83.429 116.175,83.429 117.825,83.429

## Polygon pours and split planes (outlines as drawn)
GND on Top Layer "Component Side-GND" (solid, pour order 54): 0,38.5 5,38.5 5.712,38.551 6.409,38.703 7.077,38.952 7.703,39.294 8.274,39.721 8.779,40.226 9.206,40.797 9.548,41.423 9.797,42.091 9.949,42.788 10,43.5 9.949,44.212 9.797,44.909 9.548,45.577 9.206,46.203 8.779,46.774 8.274,47.279 7.703,47.706 7.077,48.048 6.409,48.297 5.712,48.449 5,48.5 0,48.5 0,87 122,87 122,48.5 117,48.5 116.288,48.449 115.591,48.297 114.923,48.048 114.297,47.706 113.726,47.279 113.221,46.774 112.794,46.203 112.452,45.577 112.203,44.909 112.051,44.212 112,43.5 112.051,42.788 112.203,42.091 112.452,41.423 112.794,40.797 113.221,40.226 113.726,39.721 114.297,39.294 114.923,38.952 115.591,38.703 116.288,38.551 117,38.5 122,38.5 122,0 0,0
NetC2_2 on Top Layer "Component Side-NetC2_2" (solid, pour order 0): 51.5,34.956 51.5,31.651 55.945,31.651 55.945,28.456 62.75,28.456 62.75,34.956
+20 on Top Layer "Top Layer-+20" (solid, pour order 25): 26.7,3.9 36.8,3.9 36.8,25.25 55.75,25.25 55.75,31.706 26.7,31.706
A1 on Top Layer "Top Layer-A1" (solid, pour order 38): 81.5,69 88,69 88,77.25 81.5,77.25
GND on Bottom Layer "Bottom Layer - GND" (solid, pour order 44): 0,38.5 5,38.5 5.712,38.551 6.409,38.703 7.077,38.952 7.703,39.294 8.274,39.721 8.779,40.226 9.206,40.797 9.548,41.423 9.797,42.091 9.949,42.788 10,43.5 9.949,44.212 9.797,44.909 9.548,45.577 9.206,46.203 8.779,46.774 8.274,47.279 7.703,47.706 7.077,48.048 6.409,48.297 5.712,48.449 5,48.5 0,48.5 0,87 122,87 122,48.5 117,48.5 116.288,48.449 115.591,48.297 114.923,48.048 114.297,47.706 113.726,47.279 113.221,46.774 112.794,46.203 112.452,45.577 112.203,44.909 112.051,44.212 112,43.5 112.051,42.788 112.203,42.091 112.452,41.423 112.794,40.797 113.221,40.226 113.726,39.721 114.297,39.294 114.923,38.952 115.591,38.703 116.288,38.551 117,38.5 122,38.5 122,0 0,0
NetC2_2 on Bottom Layer "Bottom Layer-NetC2_2" (solid, pour order 6): 69.75,28.456 69.75,31.956 63.55,31.956 63.55,52.956 57.75,52.956 57.75,34.956 50.25,34.956 50.25,33.956 50.25,31.801 54.494,31.801 54.494,33.956 56.75,33.956 56.75,28.456
+20 on Bottom Layer "Bottom Layer-+20" (solid, pour order 42): 28,32 28,3 36,3 36,17 50.25,17 50.25,16.956 56.25,16.956 56.25,32 50.956,32 35.5,32
Sense- on Bottom Layer "Bottom Layer-VOut" (solid, pour order 27): 83.75,4 93.929,4 93.95,3.979 94,4.029 94,28.75 96.75,28.75 96.75,35.5 72.5,35.5 72.5,28.75 83.75,28.75
Sense+ on Bottom Layer "Bottom Layer-NetC13_2" (solid, pour order 8): 66.75,52.956 66.75,32.456 72.25,32.456 72.25,52.956
+5 on Signal Layer 1 "Signal Layer 1-+5" (solid, pour order 36): 12,34.5 20,34.5 20,43 20.206,43.206 39.5,43.206 39.5,80 12,80
no net on Signal Layer 1 "Signal Layer 1-No Net" (solid, pour order 32): 14.775,34.575
Return on Signal Layer 2 "Signal Layer 2-Return" (solid, pour order 40): 87,78.75 87,45.35 95.6,36.75 108.75,36.75 110.5,35 108.75,33.25 108.75,6.75 103.75,1.75 103.5,2 64.5,2 64.5,28.35 75.75,39.6 75.75,78.75

## Other copper
Top Layer:
  pour cut-out: 52.391,34.275
  pour cut-out: 50.25,33.956
Bottom Layer:
  rectangle net GND: 63.696,46.424 66.8,49.5
  rectangle net GND: 30.4,63.9 35.6,69.1

## Silkscreen, mask and mechanical layers (free items; w line width, h text height)
Board Outline:
  the board outline again, w0.2

## Text inside footprints (layer, text, board x,y; h text height)
FB1: Fab Notes "Land Pattern Adapted for Reflow Soldering" at 28.9,56.5 h0.05 r90
FB2: Fab Notes "Land Pattern Adapted for Reflow Soldering" at 41,70.9 h0.05 r180
J5: Board Outline "PCB Edge" at 29.537,86.69 h0.75 r180
P4: Top Overlay "1" at 28.492,80.325 h1 r270; Top Overlay "5" at 28.492,74.75 h1 r270